# Altium PCB PCB_C1.PcbDoc
Units mm, origin at the board's own origin, x right, y up, seen from the top; angles counter-clockwise.
Board outline 40 x 40 mm, 2 copper layers (Top Layer, Bottom Layer); 52 components, 52 nets, 213 pads, 29 vias.
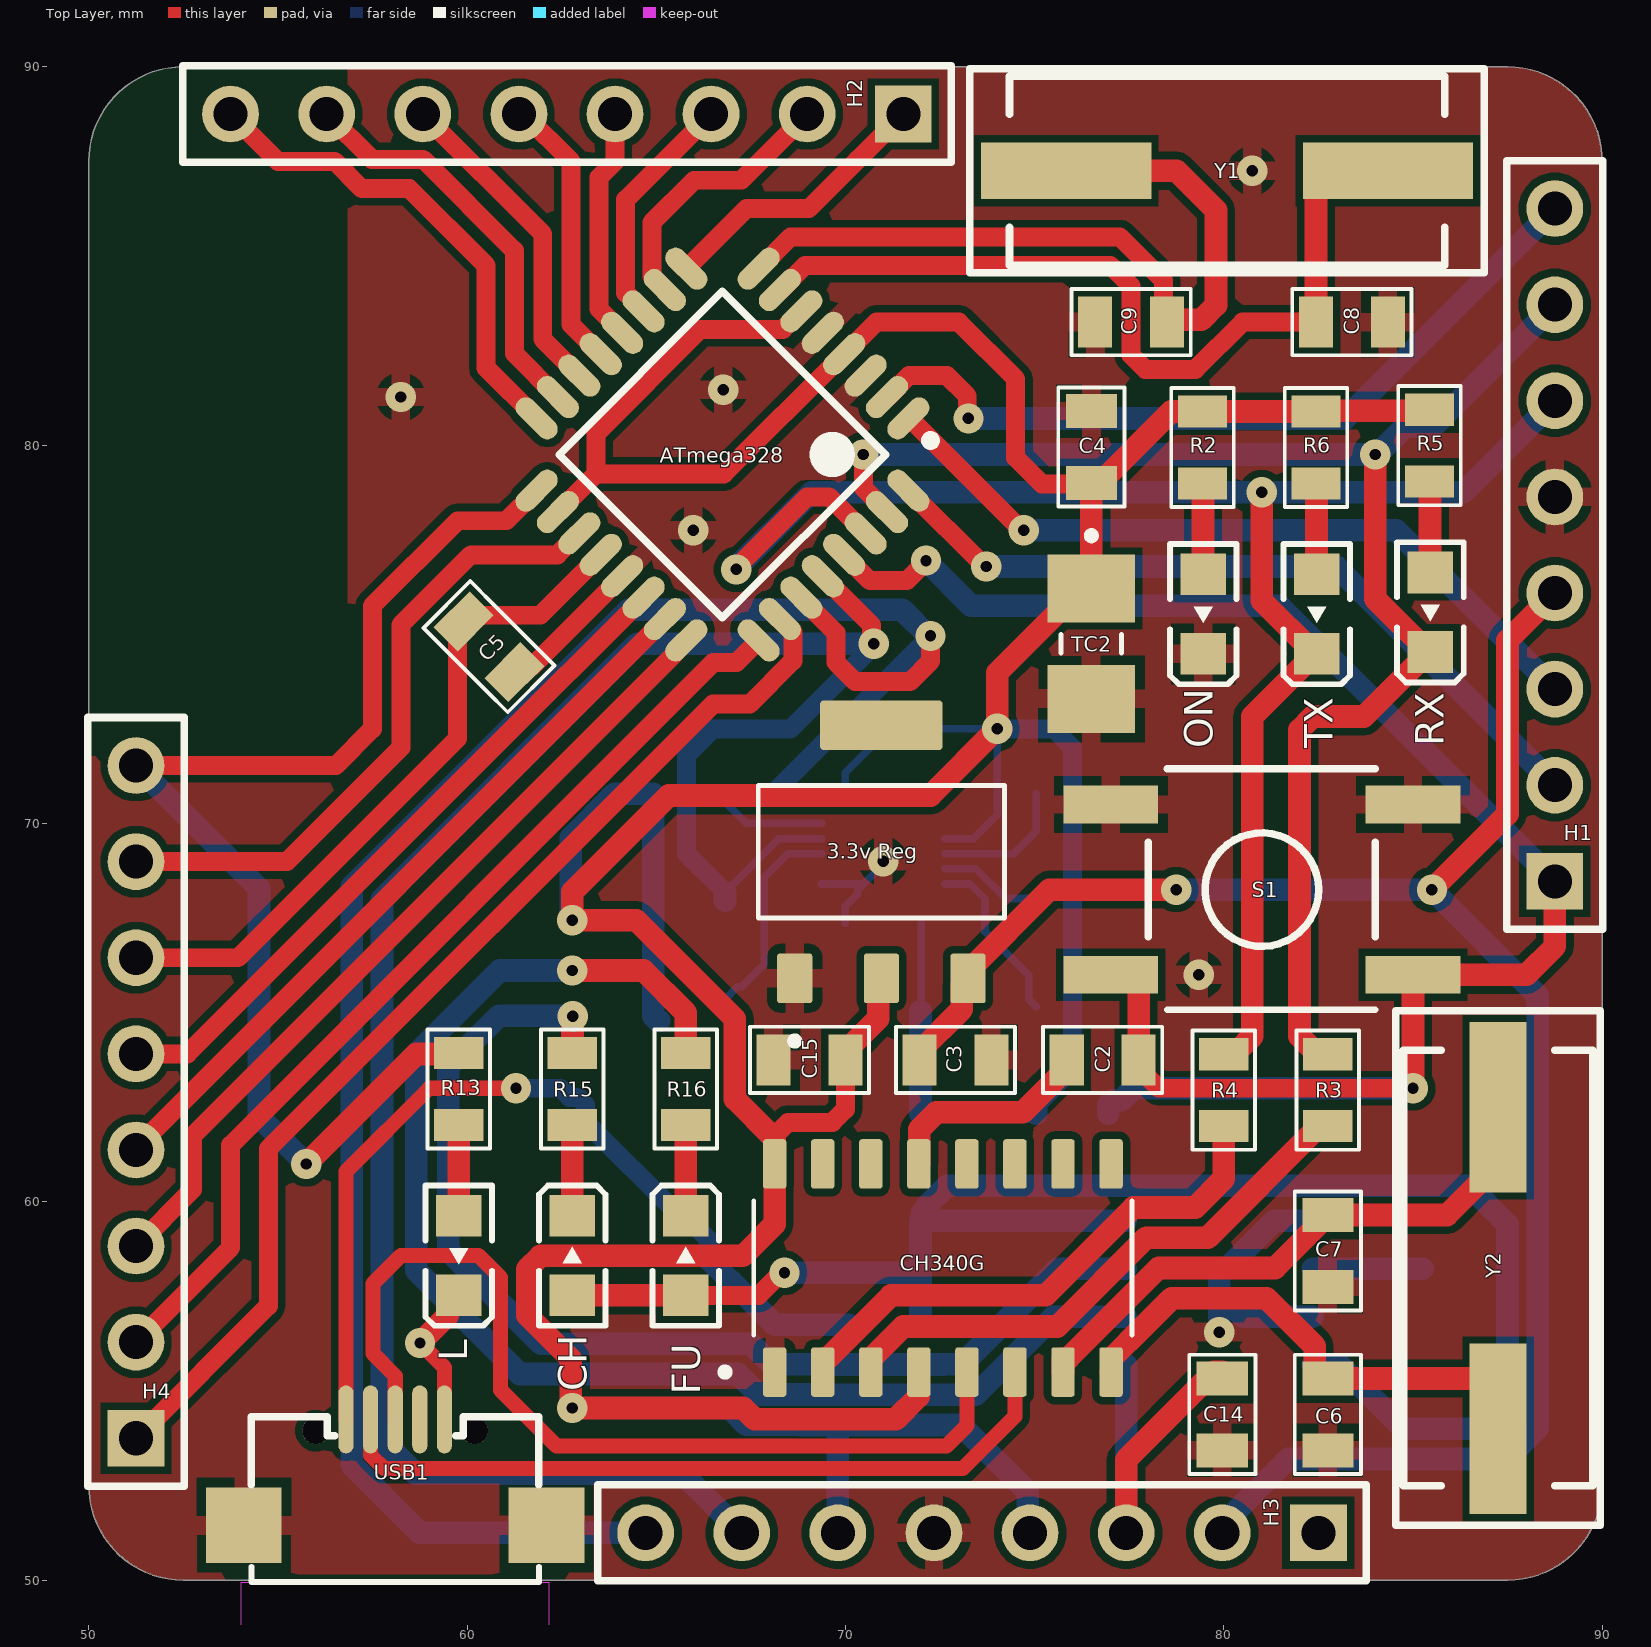
[diagram p0: Top Layer view]
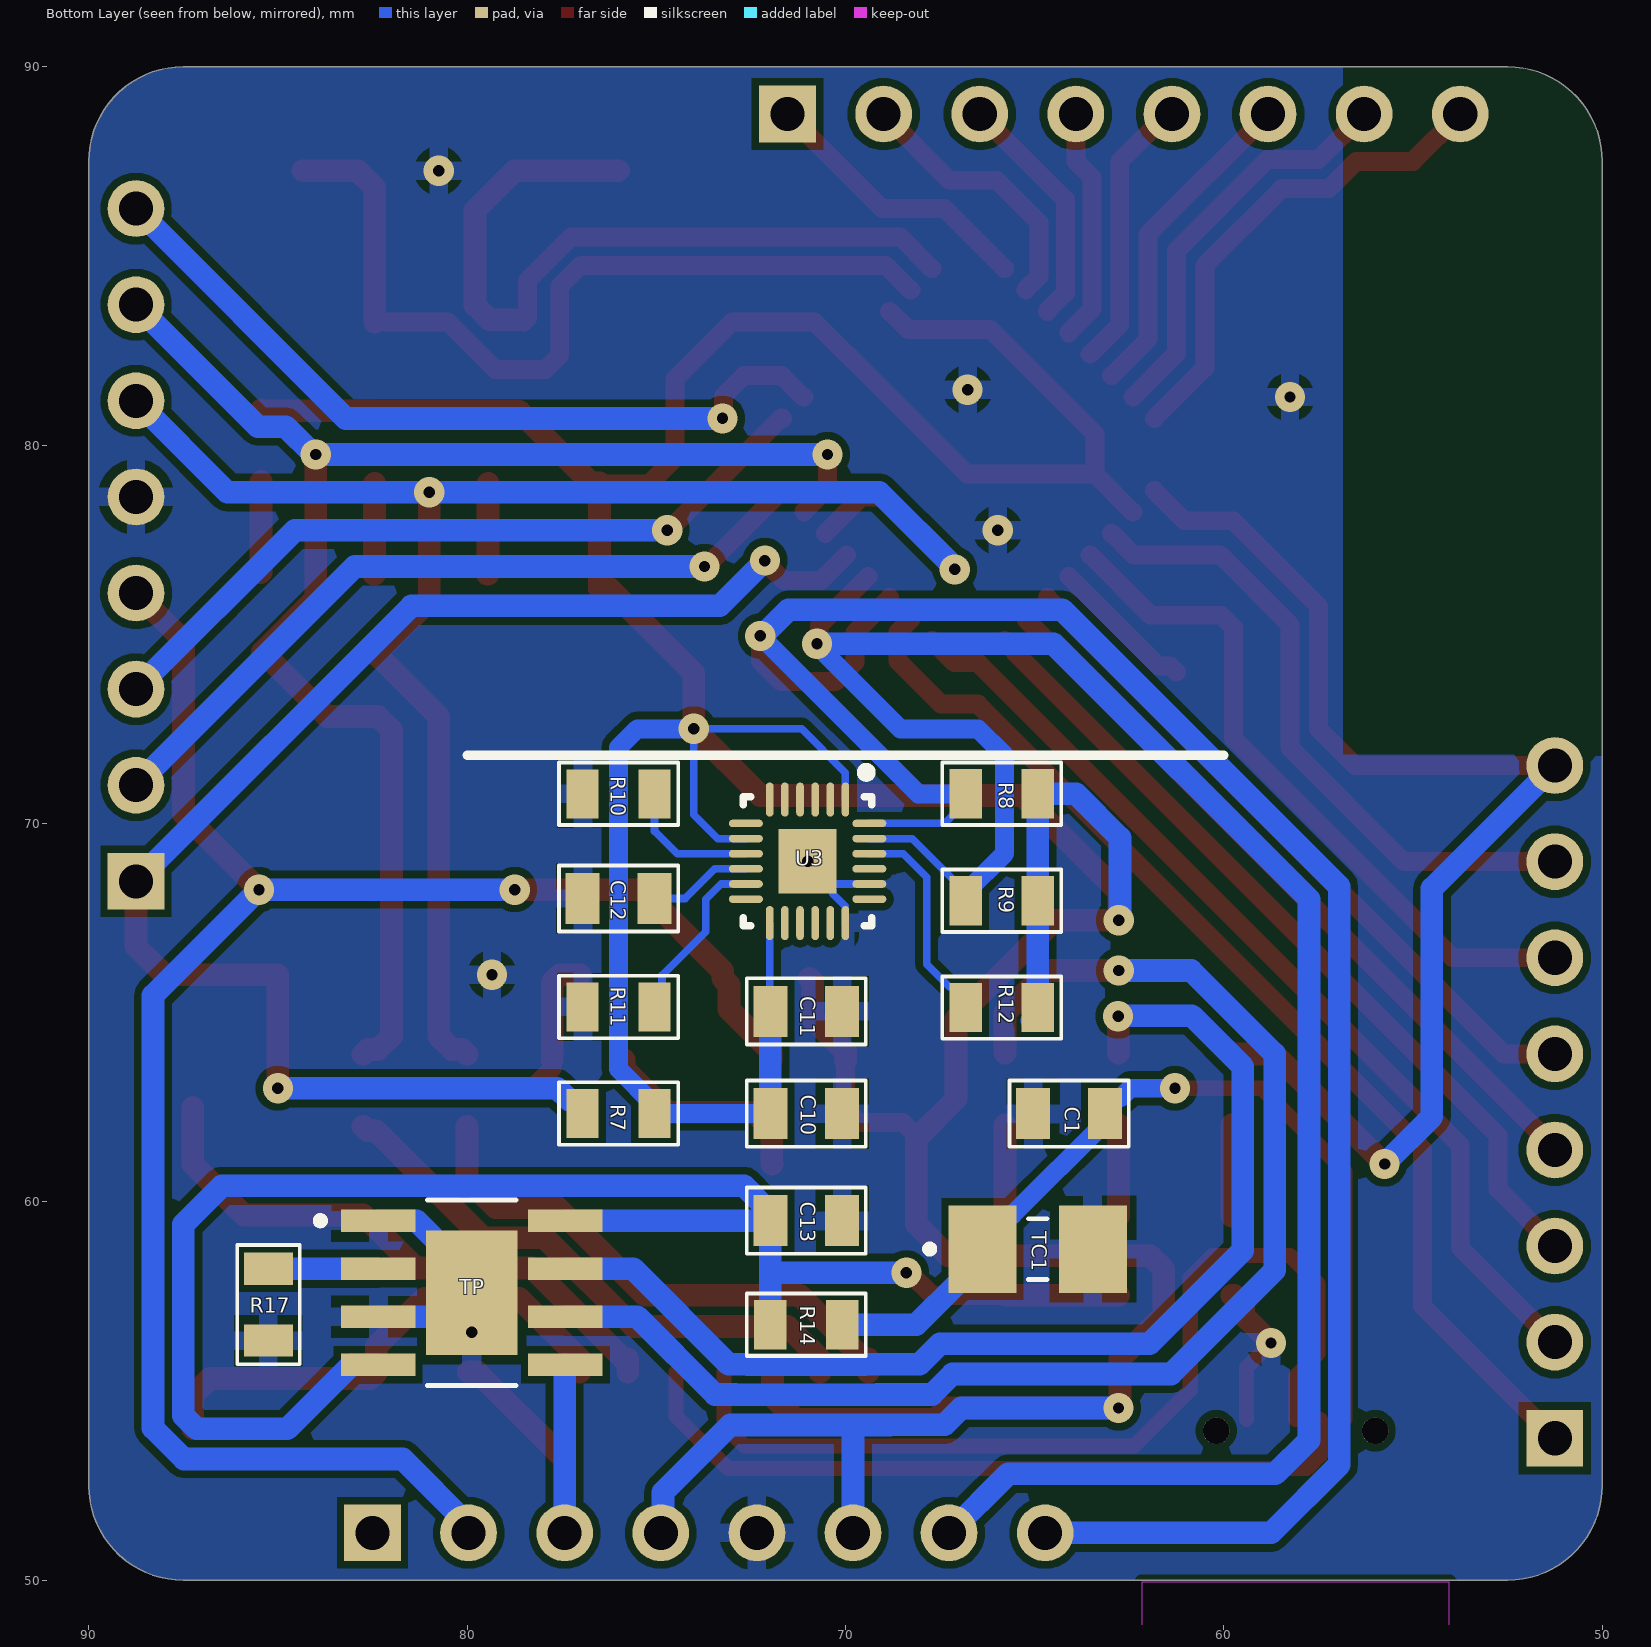
[diagram p1: Bottom Layer view, seen from below]

## Layer stack, top to bottom
Top Solder: solder mask 0.0102, Solder Resist, Dk 3.5
Top Layer: signal copper 0.0356
Dielectric 1: dielectric 0.32, FR-4, Dk 4.8
Bottom Layer: signal copper 0.0356
Bottom Solder: solder mask 0.0102, Solder Resist, Dk 3.5

## Board outline
50,52.5 50,87.5 cw(c52.5,87.5) 52.5,90 87.5,90 cw(c87.5,87.5) 90,87.5 90,52.5 cw(c87.5,52.5) 87.5,50 52.5,50 cw(c52.5,52.5)

## Design rules (kind name [scope] priority, off if disabled: settings)
Clearance [All] p1: gap=0.2 ignorepadtopadclearanceinfootprint=TRUE except(0.1: Arc-SMDPad Track-SMDPad SMDPad-SMDPad)
HoleSize [All] p1: absolutevalues=TRUE maxlimit=1 minlimit=0.025 maxpercent=80.000 minpercent=20.000
HoleToHoleClearance [All] p1: gap=0.2 allowstackedmicrovias=TRUE
MinimumSolderMaskSliver [All] p1: minsoldermaskwidth=0.01
PlaneClearance [All] p1: clearance=0.5
PolygonConnect [All] p1: connectstyle=Relief reliefconductorwidth=0.5 reliefentries=4 polygonreliefangle="90 Angle" airgapwidth=0.25
RoutingVias [All] p1: holewidth=0.3 width=0.8 viastyle="Through Hole" minholewidth=0.3 minwidth=0.8 maxholewidth=0.3 maxwidth=0.8
SilkToSilkClearance [All] p1: silktosilkclearance=0
SilkToSolderMaskClearance [IsPad] p1: minsilkscreentomaskgap=0.1 clearancetoexposedcopper=TRUE
SolderMaskExpansion [All] p1: expansion=0.2 istentingtop=FALSE
SupplyNets "Schematic Supply Nets" [InNet('3.3v')] p1: voltage=0.000
SupplyNets "Schematic Supply Nets_3" [InNet('VCC')] p2: voltage=0.000
SupplyNets "Schematic Supply Nets_1" [InNet('GND')] p3: voltage=0.000
Width [All] p1: maxlimit=0.6 minlimit=0.2 preferedwidth=0.5
24 further rules are at their usual default settings.

## Components (designator, comment, footprint, x,y, rotation, side; value= is the part's Value field where it differs from the comment)
"3.3v Reg" "AMS1117-3.3" SOT229P700X180-4N 70.95,69.25 r90 top
ATmega328 "" 32A_L 66.75,79.75 r225 top (schematic designator 328)
C1 "0.1uF" CAP0805 70.401,59.672 r180 bottom
C2 "0.1uF" CAP0805 70.486,61.09 r0 top
C3 "0.1uF" CAP0805 66.596,61.09 r0 top
C4 "0.1uF" CAP0805 79.16,73.636 r90 top
C5 "0.1uF" CAP0805 66.924,72.088 r135 top
C6 "22pF" CAP0805 85.41,48.066 r90 top
C7 "22pF" CAP0805 85.41,52.386 r90 top
C8 "22pF" CAP0805 89.701,85.91 r180 top
C9 "22pF" CAP0805 71.236,80.59 r0 top
C10 "0.01uF" CAP0805 64.722,64.992 r0 bottom
C11 "0.1uF" CAP0805 64.722,67.692 r0 bottom
C12 "0.1uF" CAP0805 69.682,70.676 r0 bottom
C13 "10uF" CAP0805 77.35,56.84 r180 bottom
C14 "10uF" CAP0805 82.62,48.066 r90 top
C15 "0.1uF" CAP0805 62.736,61.09 r0 top
CH "" LED_SMD_0805 62.241,55.859 r270 top
CH340G "" SOIC127P600X180-16N 72.575,58.25 r90 top
FU "" LED_SMD_0805 65.241,55.859 r270 top
H1 "" "Header 8" 108.816,51.579 r90 top
H2 "" "Header 8" 88.421,108.816 r180 top
H3 "" "Header 8" 99.391,71.316 r180 top
H4 "" "Header 8" 71.316,36.859 r90 top
L "" LED_SMD_0805 60.323,61.293 r90 top
ON "" LED_SMD_0805 80,78.25 r90 top
R2 "1k" RES0805 81.75,76.25 r90 top
R3 "1k" RES0805 85.063,59.263 r90 top
R4 "1k" RES0805 82.313,59.263 r90 top
R5 "330" RES0805 87.75,76.298 r90 top
R6 "330" RES0805 84.75,76.25 r90 top
R7 "1k" RES0805 79.683,60.019 r180 bottom
R8 "10k" RES0805 69.556,68.469 r180 bottom
R9 "10k" RES0805 69.556,65.644 r180 bottom
R10 "10k" RES0805 72.309,73.095 r0 bottom
R11 "10k" RES0805 79.683,62.837 r180 bottom
R12 "10k" RES0805 69.556,62.819 r180 bottom
R13 "1k" RES0805 57.469,66.667 r270 top
R14 "0.4" RES0805 74.723,54.437 r180 bottom
R15 "1k" RES0805 65.095,59.293 r90 top
R16 "1k" RES0805 63.469,66.667 r270 top
R17 "1.2k" RES0805 82.937,53.593 r90 bottom
RX "" LED_SMD_0805 86,78.298 r90 top
S1 "" "Push Button Switch SMD" 109.478,95.555 r180 top
TC1 "4.7u" CAPMP3516X190N 64.919,58.75 r180 bottom
TC2 "4.7uF" CAPMP3516X190N 76.5,74.75 r270 top
TP "" SOIC127P600X175-9N 79.876,57.595 r180 bottom
TX "" LED_SMD_0805 83,78.25 r90 top
U3 "MPU-9250" INSE-QFN-24-1700X1540TP_M 71,69 r270 bottom
USB1 "USB MICRO USB_AB_BM_SHS" "USB MICRO USB_AB_BM_SHS" 26.198,99.891 r270 top
Y1 "16MHz" "Crystal SMD" 71.474,82.701 r0 top
Y2 "12MHz" "Crystal SMD" 82.701,66.863 r270 top

## Footprints (in the part's own frame and the unit in brackets; to place one, negate y for a bottom-side part, rotate by r counter-clockwise, add the part's x,y. Pads: shape width x height; smd on the part's side, far side on the other; paste and mask are expansions set on the pad)
32A_L [mm] "Thin QFP, 32-Leads, Body 7x7mm, Pitch 0.8mm, IPC High Density"
  oval 1.35x0.55 smd: 1(-4.15,2.8) 2(-4.15,2) 3(-4.15,1.2) 4(-4.15,0.4) 5(-4.15,-0.4) 6(-4.15,-1.2) 7(-4.15,-2) 8(-4.15,-2.8) 17(4.15,-2.8) 18(4.15,-2) 19(4.15,-1.2) 20(4.15,-0.4) 21(4.15,0.4) 22(4.15,1.2) 23(4.15,2) 24(4.15,2.8)
  oval 0.55x1.35 smd: 9(-2.8,-4.15) 10(-2,-4.15) 11(-1.2,-4.15) 12(-0.4,-4.15) 13(0.4,-4.15) 14(1.2,-4.15) 15(2,-4.15) 16(2.8,-4.15) 25(2.8,4.15) 26(2,4.15) 27(1.2,4.15) 28(0.4,4.15) 29(-0.4,4.15) 30(-1.2,4.15) 31(-2,4.15) 32(-2.8,4.15)
  silkscreen extent -4.27,-3.05 3.05,3.75, body extent -3.5,-3.5 3.5,3.5, height 1.2
CAP0805 [mm]
  rect 0.9x1.35 smd: 1(5.364,2.66) 2(7.264,2.66)
  silkscreen extent 4.74,1.78 7.89,3.53, body extent 5.29,2.01 7.34,3.31, height 0.5
CAPMP3516X190N [mm]
  rect 1.79x2.31 smd: 1(-1.46,0) 2(1.46,0)
  silkscreen extent -2.96,-0.8 0.24,0.8
"Crystal SMD" [mm]
  rect 4.5x1.5 smd: 1(4.363,4.549) 2(12.863,4.549)
  silkscreen extent 1.81,1.85 15.41,7.25, body extent 2.4,2.3 14.7,6.8, height 5.18
"Header 8" [mm]
  rect 1.5x1.5 hole 0.9: 1(16.891,20.066)
  round 1.5 hole 0.9: 2(19.431,20.066) 3(21.971,20.066) 4(24.511,20.066) 5(27.051,20.066) 6(29.591,20.066) 7(32.131,20.066) 8(34.671,20.066)
  silkscreen extent 15.62,18.8 35.94,21.34, body extent 15.62,18.8 35.94,21.34, height 8.38
INSE-QFN-24-1700X1540TP_M [mm] "QFN, 24-Leads, Body 3.1x3.1mm, Pitch 0.40mm, Thermal Pad 1.54x1.70mm, IPC Low Density"
  oval 0.9x0.2 smd: 1(-1.632,1) 2(-1.632,0.6) 3(-1.632,0.2) 4(-1.632,-0.2) 5(-1.632,-0.6) 6(-1.632,-1) 13(1.632,-1) 14(1.632,-0.6) 15(1.632,-0.2) 16(1.632,0.2) 17(1.632,0.6) 18(1.632,1)
  oval 0.2x0.9 smd: 7(-1,-1.632) 8(-0.6,-1.632) 9(-0.2,-1.632) 10(0.2,-1.632) 11(0.6,-1.632) 12(1,-1.632) 19(1,1.632) 20(0.6,1.632) 21(0.2,1.632) 22(-0.2,1.632) 23(-0.6,1.632) 24(-1,1.632)
  rect 1.7x1.54 smd: 25(0,0)
  silkscreen extent -2.47,-1.7 1.7,1.7, body extent -1.55,-1.55 1.55,1.55, height 1.05
LED_SMD_0805 [mm]
  rect 1.1x1.2 smd: 1(-3.767,0.541) 2(-1.667,0.541)
  silkscreen extent -4.57,-0.34 -0.86,1.42, body extent -3.72,-0.08 -1.72,1.17, height 0.7
"Push Button Switch SMD" [mm]
  rect 2.5x1 smd: 1(24.478,29.555) 1(32.463,29.555) 2(24.478,25.055) 2(32.463,25.055)
  silkscreen extent 25.47,24.1 31.47,30.48, body extent 23.97,24.3 32.97,30.3, height 5
RES0805 [mm]
  rect 0.85x1.3 smd: 1(2.737,2.313) 2(4.637,2.313)
  silkscreen extent 2.11,1.49 5.26,3.14, body extent 2.66,1.66 4.71,2.96, height 0.5
SOIC127P600X175-9N [mm]
  rect 1.97x0.6 smd: 1(-2.475,1.905) 2(-2.475,0.635) 3(-2.475,-0.635) 4(-2.475,-1.905) 5(2.475,-1.905) 6(2.475,-0.635) 7(2.475,0.635) 8(2.475,1.905)
  rect 2.413x3.302 smd paste-3: 9(0,0)
  silkscreen extent -4.1,-2.45 1.17,2.45, body extent -3,-2.45 3,2.45, height 1.75
SOIC127P600X180-16N [mm]
  rrect25% 1.31x0.62 smd: 1(-2.75,4.445) 2(-2.75,3.175) 3(-2.75,1.905) 4(-2.75,0.635) 5(-2.75,-0.635) 6(-2.75,-1.905) 7(-2.75,-3.175) 8(-2.75,-4.445) 9(2.75,-4.445) 10(2.75,-3.175) 11(2.75,-1.905) 12(2.75,-0.635) 13(2.75,0.635) 14(2.75,1.905) 15(2.75,3.175) 16(2.75,4.445)
  silkscreen extent -2.85,-5 1.77,5.85, body extent -3,-5 3,5, height 1.8
SOT229P700X180-4N [mm]
  rrect15% 1.31x0.93 smd: 1(-3.345,2.29) 2(-3.345,0) 3(-3.345,-2.29)
  rrect15% 1.31x3.24 smd: 4(3.345,0)
  silkscreen extent -5.1,-3.25 1.75,3.25, body extent -3.5,-3.25 3.5,3.25, height 1.8
"USB MICRO USB_AB_BM_SHS" [mm]
  oval 1.8x0.4 smd: 1(45.641,30.602) 2(45.641,31.252) 3(45.641,31.902) 4(45.641,32.552) 5(45.641,33.202)
  rect 2x2 smd: 5(48.441,27.902) 5(48.441,35.902)
  round 0.7 hole 0.7: H(45.941,29.802) H(45.941,34.002)
  Keep-Out Layer board cut-out: 49.941,35.966 51.332,35.966 51.332,27.838 49.941,27.838
  silkscreen extent 45.57,28.1 49.94,35.7, body extent 45.26,27.9 51.3,35.9, height 2.75

## Part data
"3.3v Reg": "Sot223/Pkg 1-Amp 3.3-Volt Low Drop Out Voltage Regulatator", Package="SOT-223 Seeed Technology", Availability="Not in stock", Check_prices=https://www.snapeda.com/parts/AMS1117-3.3/Advanced+Monolithic+Systems/view-part/?ref=eda, MF="Advanced Monolithic Systems", MP=AMS1117-3.3, Price=None, SnapEDA_Link=https://www.snapeda.com/parts/AMS1117-3.3/Advanced+Monolithic+Systems/view-part/?ref=snap
ATmega328: library part CMP-0095-00261-2, "8-bit AVR Microcontroller, 32KB Flash, 1KB EEPROM, 2KB SRAM, 32-pin TQFP, Industrial Grade (-40°C to 85°C)", Code_JEDEC=MS-026-ABA, ComponentLink1Description="Manufacturer URL", ComponentLink1URL=http://www.atmel.com/, ComponentLink2Description="ATmega48A/48PA/88A/88PA/168A/168PA/328/328P Datasheet", ComponentLink2URL=http://www.atmel.com/dyn/resources/prod_documents/doc8271.pdf, ComponentLink3Description="ATmega48A/48PA/88A/88PA/168A/168PA/328/328P Summary", ComponentLink3URL=http://www.atmel.com/dyn/resources/prod_documents/8271S.pdf, DatasheetVersion="revD, May-2011", PackageDescription="32-Lead, 7x7x1.0 mm Body, 0.8mm Lead Pitch, Thin Profile Plastic Quad Flat Package (TQFP)", PackageReference=32A, PackageVersion="revC, Oct-2010", RevisionNote="DatasheetVersion & PackageVersion updated. URLs added."
C1 C2 C3 C4 C5 C6 C7 C8 C9 C10 C11 C12 C13 C14 C15: library part CAP0805, "CAP0805"
CH FU L ON RX TX: library part LED_SMD_0805
CH340G: library part CH340G, "USB Interface Integrated Circuit", Package=None, Availability="Not in stock", Check_prices=https://www.snapeda.com/parts/Ch340G/WCH/view-part/?ref=eda, MF=WCH, MP=Ch340G, Price=None, SnapEDA_Link=https://www.snapeda.com/parts/Ch340G/WCH/view-part/?ref=snap
H1 H2 H3 H4: library part "Header 8"
R2 R3 R4 R5 R6 R7 R8 R9 R10 R11 R12 R13 R14 R15 R16 R17: library part RES0805, "RES0805"
S1: library part "Push Button Switch SMD"
TC1 TC2: library part TAJB475K025RNJ, "4.7 ÂµF Molded Tantalum Capacitors 25 V 1411 (3528 Metric), 1210 1.5Ohm", Package="1411 AVX Corporation", Availability="In Stock", Check_prices=https://www.snapeda.com/parts/TAJB475K025RNJ/AVX/view-part/?ref=eda, MF=AVX, MP=TAJB475K025RNJ, Price=None, Purchase-URL=https://pricing.snapeda.com/search/part/TAJB475K025RNJ/?ref=eda, SnapEDA_Link=https://www.snapeda.com/parts/TAJB475K025RNJ/AVX/view-part/?ref=snap
TP: library part TP4056-42-ESOP8, "TP4056-42-ESOP8 TP", Package=None, Check_prices=https://www.snapeda.com/parts/TP4056-42-ESOP8/Lite-On/view-part/?ref=eda, MF="Lite-On Semiconductor", MP=TP4056-42-ESOP8, SnapEDA_Link=https://www.snapeda.com/parts/TP4056-42-ESOP8/Lite-On/view-part/?ref=snap
U3: library part CMP-2100-03657-1, "9-axis MotionTracking device, 2.4 to 3,6 V, -40 to 85 degC, 24-Pin QFN, RoHS, Tape and Reel", Case/Package=QFN, Manufacturer=InvenSense, Max Operating Temperature=85degC, Max Supply Voltage=3.6V, Min Operating Temperature=-40degC, Min Supply Voltage=2.4V, Package Description="24-Pin Quad Flat No-lead Package, Body 3 x 3 mm, Pitch 0.4 mm", Package Quantity=1, Package Reference=QFN-24, Datasheet URL=http://datasheet.octopart.com/MPU-9250-InvenSense-datasheet-21859386.pdf, Datasheet Version="Rev. 1.0, 01/2014", Height=1mm, Length=3.1mm, Manufacturer URL=http://www.invensense.com/, Mount=SurfaceMount, RoHSCompliant=true, Width=3.1mm
Y1 Y2: library part "Crystal SMD", "Crystal SMD"

## Via types
v1: diameter 0.8, hole 0.3, Top Layer to Bottom Layer, 29 vias

## Nets (pads, with @x,y where several pads share a name; then routed paths per layer and width w, separated by ;. In a path a pad name is that pad's centre, name@x,y a point inside that pad or via, vN(x,y) a via of type N, cw(c..) or ccw(c..) an arc to the next point about the centre after c; other vN are vias at no path point)
3.3v: "3.3v Reg.2" ATmega328.4 ATmega328.6 ATmega328.18 C4.1 C10.2 C11.2 C15.2 CH340G.4 CH340G.16 H3.4 H3.6 R2.2 R5.2 R6.2 R7.2 R8.2 R9.2 R12.2 TC2.1 U3.1 U3.8 U3.13 | length 154.1
  Top Layer w0.5: ATmega328.18 63.408,79.237 ; 68.13,61.745 68.483,62.098 69.656,62.098 70,62.442 C15.2 ; ATmega328.6 68.822,83.533 68.347,83.057 66.168,83.057 63.408,80.298 63.408,79.237 ; C4.1 76.476,78.976 75.189,78.976 74.5,79.665 74.5,81.75 73,83.25 70.816,83.25 ATmega328.4 69.954,82.402 66.789,79.237 63.408,79.237
  Top Layer w0.6: 68.12,61.705 68.09,61.705 67.078,62.716 67.078,64.829 64.463,67.444 v1(62.78,67.444) 62.78,68.186 65.332,70.738 72.248,70.738 v1(74.01,72.5) 74.01,73.98 76.24,76.21 TC2.1 C4.1 76.725,79 78.612,80.887 R2.2 R6.2 82.461,80.911 85.413,80.911 R5.2 ; 68.13,61.695 CH340G.16 68.13,59.411 67.29,58.571 61.939,58.571 61.587,58.22 61.587,57.005 62.743,55.849 62.743,54.588 v1(62.782,54.55) 67.301,54.55 67.601,54.25 71.329,54.25 71.93,54.851 71.93,55.49 CH340G.4 ; C15.2 70,63.975 70.15,64.125 70.864,64.839 70.864,65.819 70.95,65.905
  Bottom Layer w0.2: U3.1 70,71.34 71.16,72.5 v1(74.01,72.5) 74.01,70.234 73.376,69.6 U3.8 ; C11.2 72,65.046 U3.13
  Bottom Layer w0.5: C10.2 R7.2 ; v1(74.01,72.5) 75.5,72.5 76,72 76,63.511 R7.2@75.046,62.557
  Bottom Layer w0.6: v1(62.78,67.444) 62.741,67.482 62.741,69.619 63.905,70.782 R8.2 R9.2 R12.2 64.919,64.907 65.044,64.782 R12.2@65.075,64.782 ; v1(62.782,54.55) 66.938,54.55 67.38,54.108 68.825,54.108 68.833,54.1 69.8,54.1 ; H3.6 69.8,54.1 ; C10.2 C11.2 ; H3.4 74.822,51.308 74.822,52.325 73.047,54.1 69.8,54.1 ; R7.2 R7.2@75.046,62.557
A0: ATmega328.23 H4.4 | length 19.8
  Top Layer w0.5: H4.4 51.25,61.422 ATmega328.23
A1: ATmega328.24 H4.3 | length 22
  Top Layer w0.5: H4.3 52.75,60.33 52.75,61.75 65.503,74.503 65.503,74.53 65.795,74.822 ATmega328.24
A2: ATmega328.25 H4.2 | length 25.7
  Top Layer w0.5: H4.2 53.75,58.79 53.75,61.5 66.5,74.25 67.119,74.25 ATmega328.25
A3: ATmega328.26 H4.1 | length 29.6
  Top Layer w0.5: H4.1 54.75,57.25 54.75,61.402 66.5,73.152 67.47,73.152 68.612,74.294 68.612,75.059 ATmega328.26
A4: ATmega328.27 H3.8 R8.1 U3.24 | length 58.3
  Top Layer w0.5: ATmega328.27 68.836,75.953 69.75,75.039 69.75,74.26 70.26,73.75 71.707,73.75 72.25,74.293 v1(72.25,74.957)
  Bottom Layer w0.2: R8.1 66.819,70.557 67.376,70 U3.24
  Bottom Layer w0.5: R8.1 68.075,70.782 v1(72.25,74.957)
  Bottom Layer w0.6: H3.8 58.75,51.25 56.95,53.05 56.95,68.331 64.269,75.65 71.503,75.65 72.196,74.957 v1(72.25,74.957)
A5: ATmega328.28 H3.7 R9.1 U3.23 | length 56.6
  Top Layer w0.5: ATmega328.28 69.402,76.53 70.693,75.239 70.693,74.807 v1(70.75,74.75)
  Bottom Layer w0.2: R9.1@66.819,68.182 68.237,69.6 U3.23
  Bottom Layer w0.5: R9.1@66.819,68.182 65.795,69.205 65.795,71.795 66.5,72.5 68.55,72.5 70.75,74.7 v1(70.75,74.75)
  Bottom Layer w0.6: R9.1 R9.1@66.819,68.182 ; H3.7 65.697,52.813 58.638,52.813 57.75,53.7 57.75,68 64.5,74.75 v1(70.75,74.75)
A6: ATmega328.19 H4.7 | length 17.2
  Top Layer w0.5: H4.7 55.24,68.99 58.25,72 58.25,75.25 60.098,77.098 62.388,77.098 62.953,77.664 ATmega328.19
A7: ATmega328.22 H4.5 | length 18.4
  Top Layer w0.5: H4.5 52.607,63.91 60.697,72 ATmega328.22
AREF: ATmega328.20 C5.2 H4.6 | length 18.4
  Top Layer w0.5: H4.6 53.95,66.45 59.747,72.247 59.747,75.184 C5.2 60.066,75.503 61.937,75.503 ATmega328.20 ATmega328.20@63.519,77.098
"D0 / Rx": ATmega328.30 H1.6 R4.2 TX.1 | length 44.8
  Top Layer w0.5: v1(67.112,76.714) 67.112,76.756 68.986,78.63 69.567,78.63 ATmega328.30
  Top Layer w0.6: R4.2 80.125,64.025 80.399,64.025 80.75,64.376 80.75,72.824 TX.1@82.409,74.483 ; v1(81,78.75) 81,75.892 TX.1@82.409,74.483 ; TX.1 TX.1@82.409,74.483
  Bottom Layer w0.6: v1(67.112,76.714) 67.112,76.756 69.106,78.75 v1(81,78.75) 86.33,78.75 H1.6
"D1 / Tx": ATmega328.31 H1.7 R3.2 RX.1 | length 40.8
  Top Layer w0.5: v1(70.473,79.75) 70.473,78.869 71.099,78.243 ATmega328.31
  Top Layer w0.6: R3.2 82.625,64.025 82.351,64.025 82,64.376 82,72.473 82.351,72.824 83.702,72.824 85.409,74.531 84,75.94 v1(84,79.75)
  Bottom Layer w0.6: v1(70.473,79.75) 84.054,79.75 84.791,80.486 85.526,80.486 H1.7
D2: ATmega328.32 H1.2 | length 20.3
  Top Layer w0.5: ATmega328.32 71.678,78.795 73.681,76.792 v1(73.723,76.792)
  Bottom Layer w0.6: v1(73.723,76.792) 82.968,76.792 H1.2
D3: ATmega328.1 H1.3 | length 20.1
  Top Layer w0.5: ATmega328.1 71.671,80.711 71.703,80.711 74.665,77.75 v1(74.71,77.75)
  Bottom Layer w0.6: v1(74.71,77.75) 84.55,77.75 H1.3
D4: ATmega328.2 H1.8 | length 21
  Top Layer w0.5: ATmega328.2 71.112,81.27 71.678,81.836 72.684,81.836 73.22,81.301 73.22,80.735 v1(73.25,80.705)
  Bottom Layer w0.6: v1(73.25,80.705) 83.205,80.705 H1.8
D5: ATmega328.9 H2.1 | length 7.4
  Top Layer w0.5: ATmega328.9 67.381,86.25 69.03,86.25 70.323,87.543 H2.1
D6: ATmega328.10 H2.2 | length 7.2
  Top Layer w0.5: ATmega328.10 65.23,84.112 64.888,84.454 64.888,85.888 66,87 67.25,87 68.99,88.74 H2.2
D7: ATmega328.11 H2.3 | length 6.4
  Top Layer w0.5: ATmega328.11 64.664,83.547 64.188,84.023 64.188,86.488 H2.3
D8: ATmega328.12 H2.4 | length 6.2
  Top Layer w0.5: H2.4 63.91,87.5 63.488,87.078 63.488,83.592 64.098,82.981 ATmega328.12
D9: ATmega328.13 H2.5 | length 7.3
  Top Layer w0.5: H2.5 61.5,88.75 62.75,87.5 62.75,83.184 ATmega328.13
D10: ATmega328.14 H2.6 | length 8.6
  Top Layer w0.5: H2.6 62,85.58 62,82.803 ATmega328.14
"D11 / MOSI": ATmega328.15 H2.7 | length 10.8
  Top Layer w0.5: H2.7 57.49,87.55 58.838,87.55 61.25,85.138 61.25,82.422 ATmega328.15
"D12 / MISO": ATmega328.16 H2.8 | length 13
  Top Layer w0.5: H2.8 55,87.5 56.5,87.5 57.221,86.779 58.471,86.779 60.5,84.75 60.5,82.04 ATmega328.16
"D13 / SCK": ATmega328.17 H4.8 R13.1 | length 33.1
  Top Layer w0.5: H4.8 56.53,71.53 57.5,72.5 57.5,75.75 59.75,78 61.04,78 ATmega328.17
  Top Layer w0.6: v1@55.788,61.038 58.657,63.907 59.758,63.907 R13.1
  Bottom Layer w0.6: H4.8 54.5,68.28 54.5,62.25 v1(55.75,61)
GND: "3.3v Reg.1" ATmega328.3 ATmega328.5 ATmega328.21 C1.1 C3.2 C4.2 C5.1 C6.1 C7.1 C8.1 C9.1 C10.1 C11.1 C12.2 C13.2 C14.1 C15.1 CH340G.1 H1.5 H3.5 L.1 ON.1 R10.2 R11.1 R17.1 S1.2 TC1.2 TC2.2 TP.1 TP.3 TP.9 U3.18 U3.20 U3.25 USB1.5 | length 19
  Top Layer w0.4: v1(58.754,56.269) 59.4,55.623 USB1.5@59.4,54.25
  Top Layer w0.5: C5.1 61.409,74.159 61.725,74.159 ATmega328.21
  Top Layer w0.6: v1@58.792,56.307 59.482,56.997 59.482,57.276 59.732,57.526 L.1
  Bottom Layer w0.2: U3.20 U3.25@70.4,68.4 ; U3.18 70,67.807 70.33,68.137 70.33,68.25 70.887,68.807 71,68.807 v1(71,69) ; U3.25@70.44,68.36 U3.25@70.944,68.864
  Bottom Layer w0.6: v1(79.876,56.551) TP.9 ; TP.3 80.511,56.96 TP.9 ; TP.1 81.337,59.5 79.876,58.04 TP.9
  other v1: 79.341,66 65.977,77.748 58.25,81.27 66.771,81.461 80.75,87.25
NetATmega328_7: ATmega328.7 C8.2 Y1.2 | length 22.8
  Top Layer w0.5: ATmega328.7 68.284,84.099 68.935,84.75 77,84.75 77.55,84.2 77.55,82.375 77.925,82 79.25,82 80.5,83.25 C8.2
  Top Layer w0.6: C8.2 82.437,86.8 82.887,87.25 Y1.2
NetATmega328_8: ATmega328.8 C9.2 Y1.1 | length 20.9
  Top Layer w0.5: ATmega328.8 67.718,84.664 68.554,85.5 77.25,85.5 78.407,84.343 78.407,83.343 C9.2 C9.2@78.563,83.313
  Top Layer w0.6: Y1.1@76,87.25 78.75,87.25 79.793,86.207 79.793,83.699 79.407,83.313 C9.2@78.563,83.313
NetC2_1: C2.1 CH340G.13 | length 5.7
  Top Layer w0.6: CH340G.13 71.95,61.01 71.95,61.909 72.406,62.365 74.69,62.365 75.85,63.525 C2.1
NetC6_2: C6.2 CH340G.8 Y2.2 | length 13.6
  Top Layer w0.6: CH340G.8 77.03,55.51 77.03,55.855 77.885,56.71 78.626,57.451 81.13,57.451 82.402,56.179 82.402,55.48 82.552,55.33 86.8,55.33 87.25,54.88 Y2.2
NetC7_2: C7.2 CH340G.7 Y2.1 | length 15.5
  Top Layer w0.6: CH340G.7 75.75,55.845 75.76,55.855 75.882,55.855 78.278,58.251 81.351,58.251 C7.2 85.9,59.65 87.25,61 Y2.1
NetC12_1: C12.1 U3.10 | length 2.7
  Bottom Layer w0.2: U3.10 73.45,68.8 74.234,68.016 C12.1
NetC13_1: C13.1 CH.2 FU.2 R14.1 TP.4 TP.8 | length 44.9
  Top Layer w0.5: FU.2 67.709,57.526 68.308,58.125 v1(68.389,58.125)
  Top Layer w0.6: CH.2 FU.2
  Bottom Layer w0.5: C13.1 C13.1@71.986,59.725
  Bottom Layer w0.6: v1(68.389,58.125) 71.986,58.125 ; R14.1 71.986,58.125 ; C13.1@72.136,59.875 72.683,60.423 86.478,60.423 87.5,59.4 87.5,54.351 87.149,54 84.75,54 83.06,55.69 TP.4 ; TP.8 76.716,59.5 C13.1 71.986,58.125
NetCH340G_2: CH340G.2 R4.1 | length 14.3
  Top Layer w0.6: CH340G.2 69.4,55.845 69.41,55.855 69.533,55.855 71.204,57.526 75.291,57.526 77.616,59.851 79.245,59.851 80,60.606 R4.1
NetCH340G_3: CH340G.3 R3.1 | length 15
  Top Layer w0.6: CH340G.3 70.68,55.51 70.68,55.855 71.53,56.705 75.601,56.705 77.947,59.051 79.576,59.051 82.4,61.875 82.625,61.875 R3.1
NetCH340G_5: CH340G.5 USB1.3 | length 25.3
  Top Layer w0.4: USB1.3 58.1,55.4 57.512,55.988 57.512,57.842 58.25,58.58 60.304,58.58 60.887,57.997 60.887,55.029 62.366,53.55 72.671,53.55 73.21,54.089 CH340G.5
NetCH340G_6: CH340G.6 USB1.2 | length 19.9
  Top Layer w0.4: USB1.2 57.45,53.3 57.8,52.95 73.1,52.95 74.48,54.33 CH340G.6
NetCH_1: CH.1 R15.1 | length 2.4
  Top Layer w0.6: CH.1 R15.1
NetFU_1: FU.1 R16.2 | length 2.4
  Top Layer w0.6: FU.1 R16.2
NetL_2: L.2 R13.2 | length 2.4
  Top Layer w0.6: L.2 R13.2
NetON_2: ON.2 R2.1 | length 2.4
  Top Layer w0.6: R2.1 79.448,78.976 79.448,76.594 ON.2
NetR5_1: R5.1 RX.2 | length 2.4
  Top Layer w0.6: R5.1 85.448,79.024 85.448,76.642 RX.2
NetR6_1: R6.1 TX.2 | length 2.4
  Top Layer w0.6: R6.1 82.448,78.976 82.448,76.594 TX.2
NetR10_1: R10.1 U3.9 | length 3.6
  Bottom Layer w0.2: U3.9 74.45,69.2 75.046,69.796 R10.1
NetR11_2: R11.2 U3.11 | length 4.6
  Bottom Layer w0.2: U3.11 73.284,68.4 73.689,67.995 73.689,67.141 74.847,65.983 74.847,65.349 R11.2
NetR12_1: R12.1 U3.22 | length 5.7
  Bottom Layer w0.2: R12.1 66.819,65.357 67.144,65.682 67.257,65.682 67.856,66.281 67.856,68.581 68.475,69.2 U3.22
NetR15_2: R15.2 TP.7 | length 29.9
  Top Layer w0.6: R15.2 62.788,63.936 62.788,64.901 v1(62.793,64.907)
  Bottom Layer w0.6: v1(62.793,64.907) 62.78,64.921 60.849,64.921 59.5,63.572 59.5,58.711 61.961,56.25 67.5,56.25 68.043,55.708 69.488,55.708 69.495,55.7 72.577,55.7 72.584,55.708 73.088,55.708 75.61,58.23 TP.7
NetR16_1: R16.1 TP.6 | length 36.2
  Top Layer w0.6: v1(62.78,66.115) 64.661,66.115 65.782,64.994 R16.1
  Bottom Layer w0.6: v1(62.78,66.115) 60.865,66.115 58.657,63.907 58.657,58.187 61.394,55.45 67.169,55.45 67.711,54.908 69.156,54.908 69.164,54.9 72.908,54.9 72.916,54.908 73.448,54.908 75.5,56.96 TP.6
NetR17_2: R17.2 TP.2 | length 2.9
  Bottom Layer w0.6: TP.2 R17.2
RESET: ATmega328.29 C2.2 H1.1 R7.1 S1.1 | length 50.6
  Top Layer w0.5: ATmega328.29 70.647,76.418 71.627,76.418 72.128,76.92 v1(72.128,76.947) ; C2.2 77.75,63.525 78.275,63 v1(85,63)
  Top Layer w0.6: S1.1@77.015,66 77.55,66 77.75,65.8 C2.2 ; v1(85,63) 85,66 88,66 88.75,66.75 H1.1
  Bottom Layer w0.6: v1(72.128,76.947) 73.325,75.75 81.47,75.75 H1.1 ; R7.1 76.946,62.557 77.071,62.682 77.296,62.682 77.614,63 v1@84.946,63
Vbat: C14.2 H3.3 TP.5 | length 9.9
  Top Layer w0.6: H3.3 77.42,53.185 79.735,55.5 C14.2@79.96,55.5
  Bottom Layer w0.6: TP.5 77.42,55.69 H3.3
VCC: C1.2 R14.2 TC1.1 USB1.1 | length 23.9
  Top Layer w0.4: USB1.1 56.8,60.8 59,63 v1(61.291,63)
  Bottom Layer w0.5: v1(61.291,63) 62.469,63 62.712,62.757 62.937,62.757 63.137,62.557 63.137,62.107 65.589,59.655 65.734,59.655 66.379,59.01 TC1.1 TC1.1@66.379,58.49
  Bottom Layer w0.6: TC1.1@66.379,58.49 66.974,57.895 66.987,57.895 68.132,56.75 R14.2
VIN: "3.3v Reg.3" C3.1 H1.4 H3.2 | length 50.2
  Top Layer w0.6: C3.1 71.96,63.975 73.075,65.09 73.075,65.74 73.24,65.905 73.24,66.095 75.395,68.25 v1(78.741,68.25) ; v1(85.5,68.25) 87.497,70.247 87.497,74.837 H1.4
  Bottom Layer w0.6: v1(78.741,68.25) v1(85.5,68.25) 88.3,65.45 88.3,54.02 87.48,53.2 81.7,53.2 79.96,51.46 H3.2
pads on no net: "3.3v Reg.4" CH340G.9 CH340G.10 CH340G.11 CH340G.12 CH340G.14 CH340G.15 H3.1 U3.2 U3.3 U3.4 U3.5 U3.6 U3.7 U3.12 U3.14 U3.15 U3.16 U3.17 U3.19 U3.21 USB1.4 USB1.H

## Polygon pours and split planes (outlines as drawn)
GND on Bottom Layer "GND_L02_P003" (solid, remove dead copper, pour order 3): 52.5,50 cw(c52.5,52.5) 50,52.5 50,71.817 56.85,71.817 56.85,90 87.5,90 cw(c87.5,87.5) 90,87.5 90,52.5 cw(c87.5,52.5) 87.5,50
GND on Top Layer "GND_L01_P002" (solid, remove dead copper, pour order 2): 52.5,50 cw(c52.5,52.5) 50,52.5 50,71.817 56.85,71.817 56.85,90 87.5,90 cw(c87.5,87.5) 90,87.5 90,52.5 cw(c87.5,52.5) 87.5,50

## Silkscreen, mask and mechanical layers (free items; w line width, h text height)
Bottom Overlay:
  lines w0.254: 60,71.8 80,71.8
Mechanical 1:
  lines w0.254: 49.997,71.817 56.85,71.817 56.85,90 87.5,90 ; 50,71.817 50,52.5 ; 50,52.5 ccw(c52.5,52.5) 52.5,50 87.5,50 ccw(c87.5,52.5) 90,52.5 90,87.5 ccw(c87.5,87.5) 87.5,90 ; 50,52.5 50,87.5 cw(c52.5,87.5) 52.5,90 87.5,90

## Text inside footprints (layer, text, board x,y; h text height)
USB1: Mechanical 1 "PCB EDGE" at 60.513,49.702 h0.4 r180